# Altium PCB МПСУ.464342.21-005T5M.PcbDoc
Units mm, origin at the board's own origin, x right, y up, seen from the top; angles counter-clockwise.
Board outline 125.5 x 85.5 mm, 2 copper layers (Top Layer, Bottom Layer), stack 0.543 mm thick; 73 components, 36 nets, 281 pads, 1689 vias.
Unrouted connection lines stored in the file: 83.
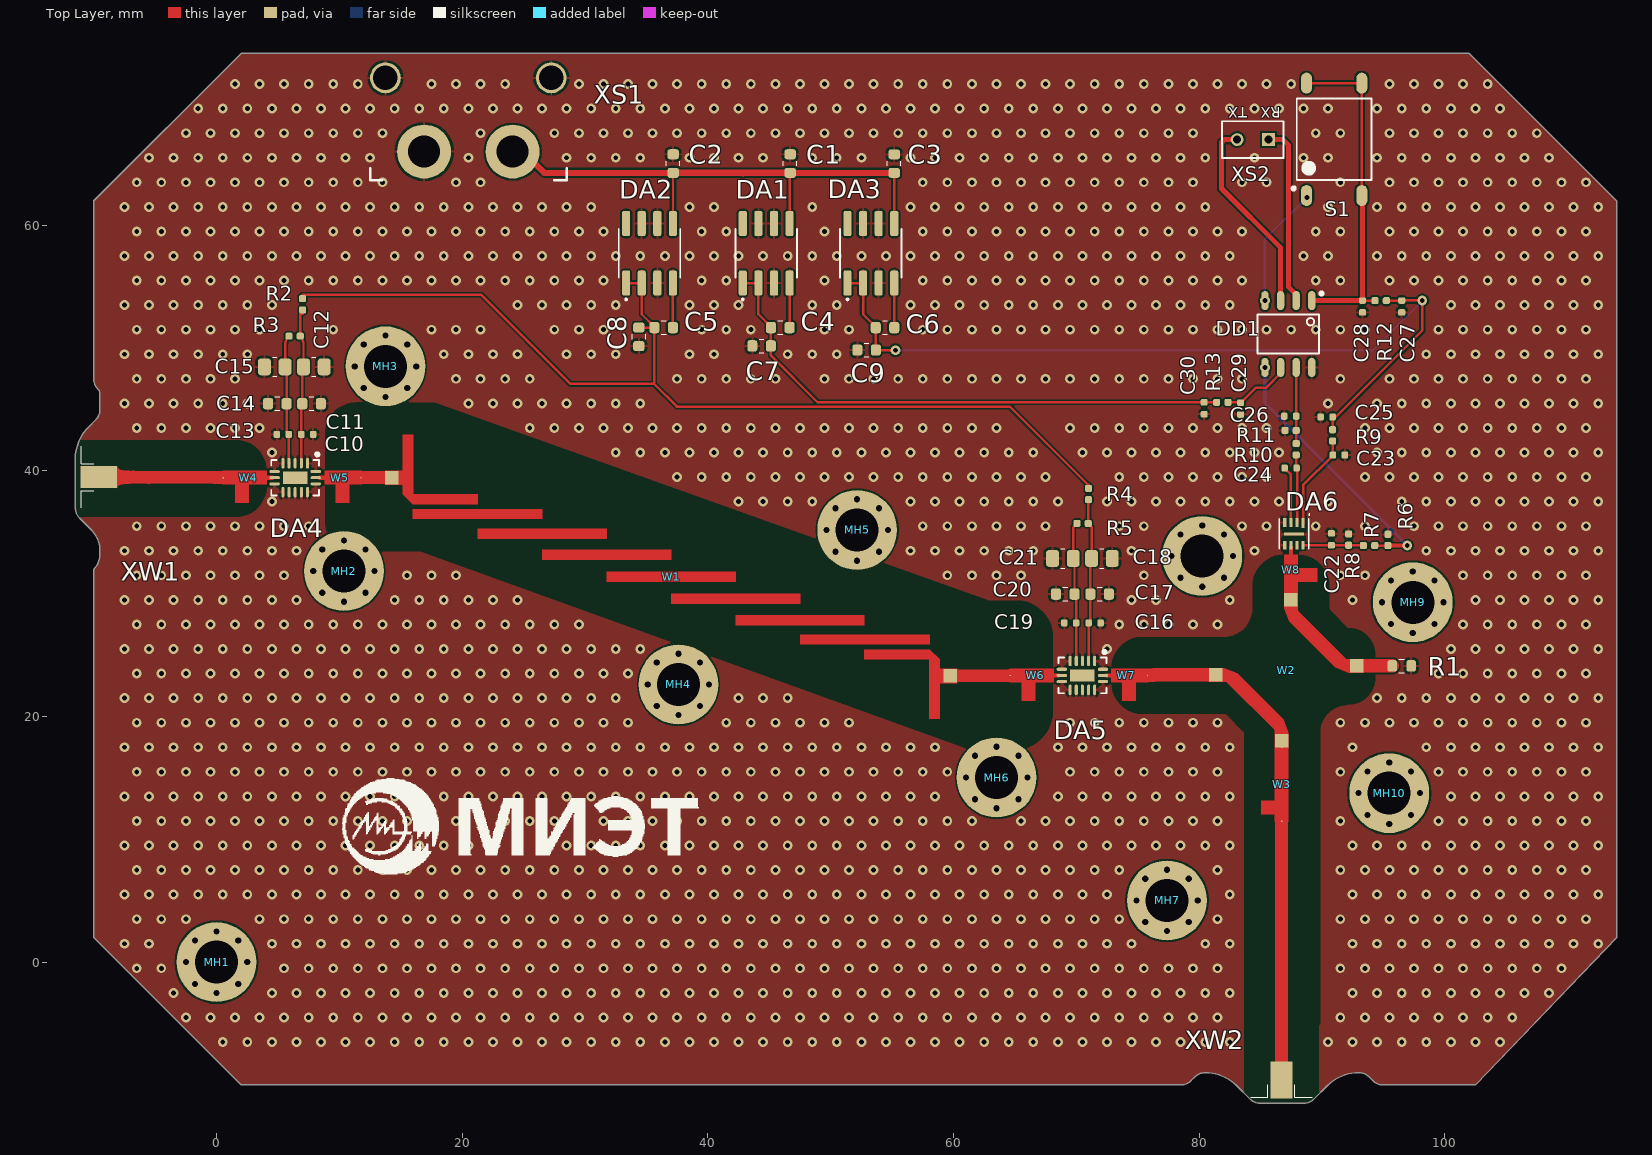
[diagram p0: Top Layer view]
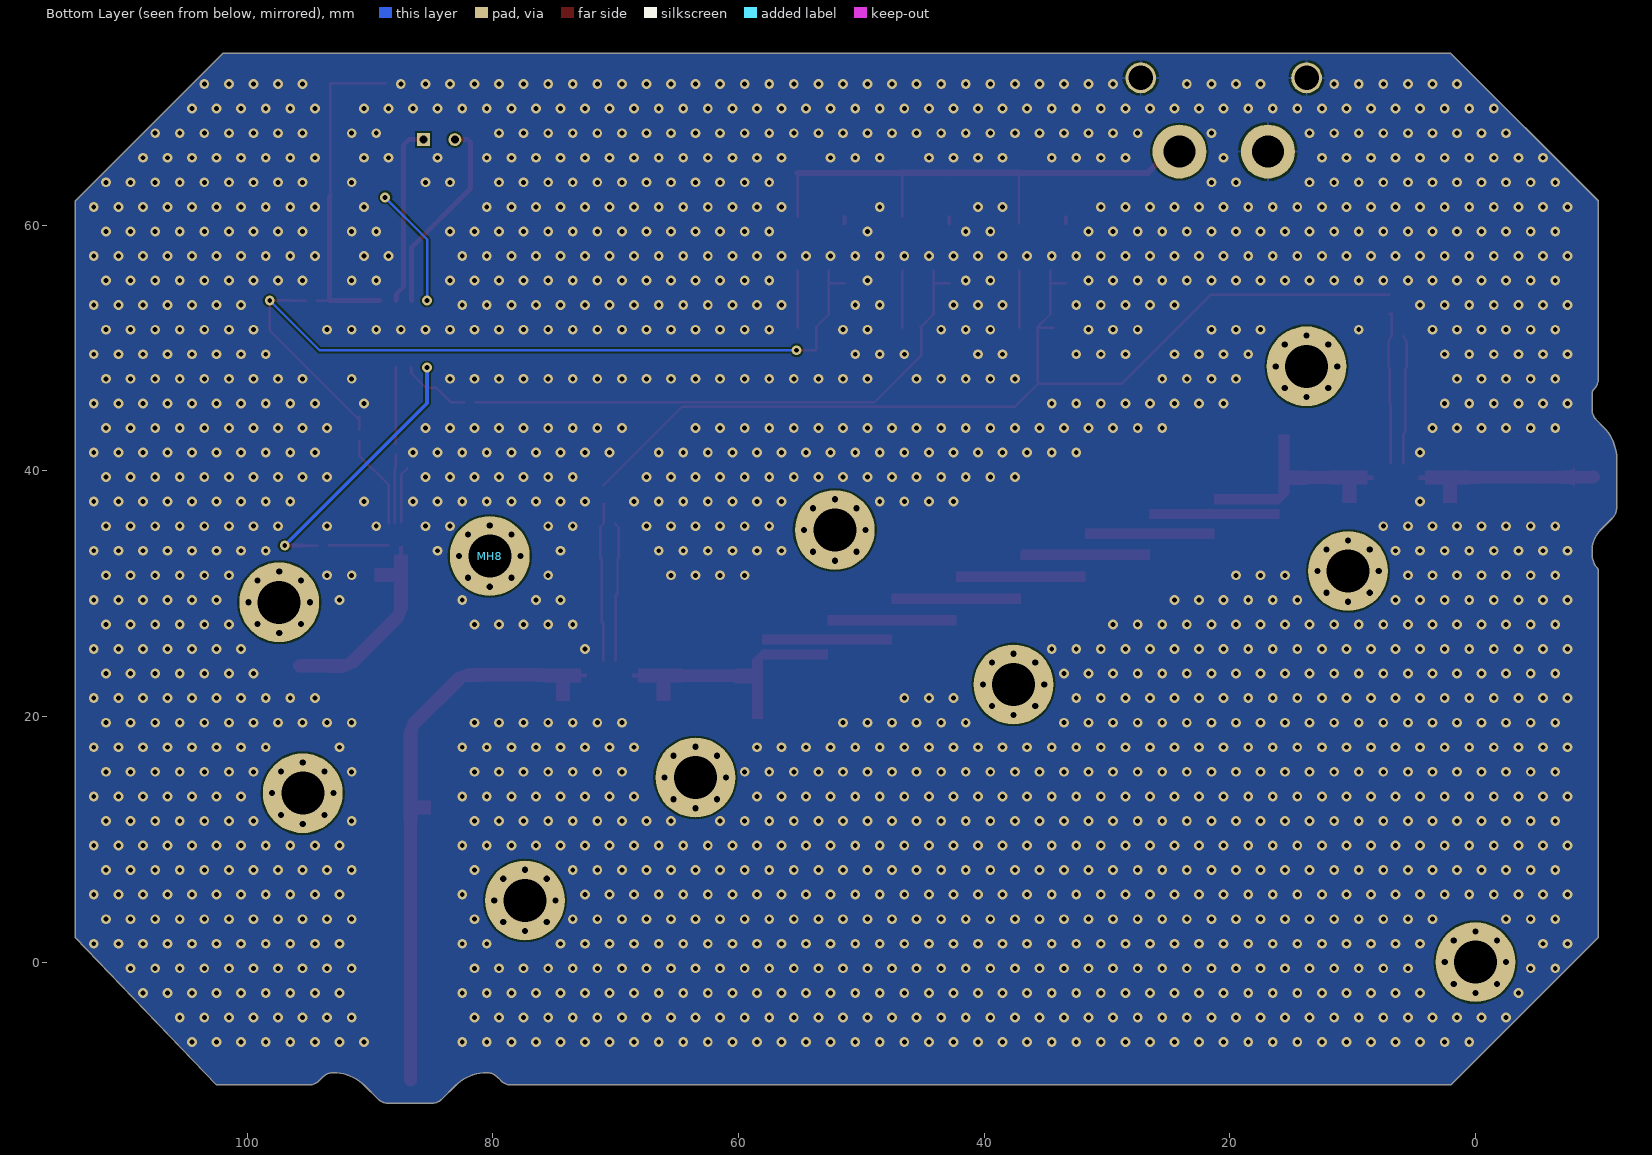
[diagram p1: Bottom Layer view, seen from below]
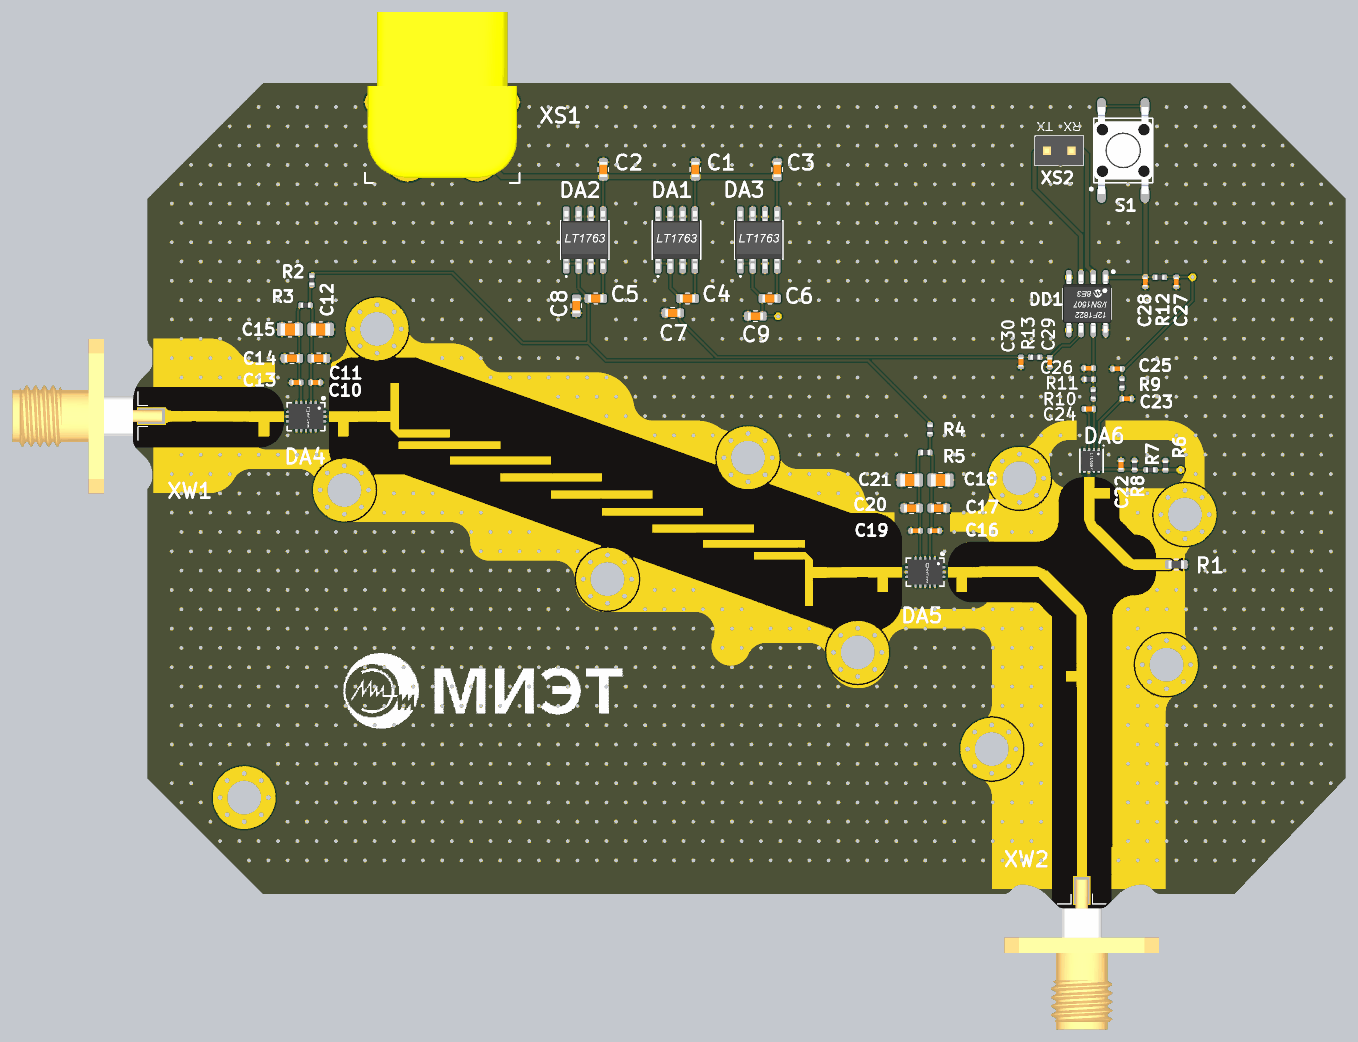
[diagram p2: 3D render of the assembled board from above, using the file's embedded part models]

## Layer stack, top to bottom
Top Solder: solder mask 0.0102, Solder Resist, Dk 3.5
Top Layer: signal copper 0.0175
RO4350B: core 0.508, RO4350B, Dk 3.48
Bottom Layer: signal copper 0.0175
Bottom Solder: solder mask 0.0102, Solder Resist, Dk 3.5

## Board outline
-10,32 ccw(c-11.207,33.207) -9.5,33.207 -9.5,33.5 ccw(c-11.914,33.5) -10.207,35.207 -11.146,36.146 cw(c-10.293,37) -11.5,37 -11.5,41 cw(c-7.879,41) -10.439,43.561 -9.854,44.146 ccw(c-10.707,45) -9.5,45 -9.5,46.293 ccw(c-10,46.293) -9.646,46.646 cw(c-8.793,47.5) -10,47.5 -10,62 2,74 102,74 114,62 114,2 102.5,-10 95,-10 cw(c95,-8.793) 94.146,-9.646 93.854,-9.354 ccw(c93,-10.207) 93,-9 ccw(c93,-12.621) 90.439,-10.061 89.354,-11.146 cw(c88.5,-10.293) 88.5,-11.5 85,-11.5 cw(c85,-10.293) 84.146,-11.146 83.061,-10.061 ccw(c80.5,-12.621) 80.5,-9 ccw(c80.5,-10.207) 79.646,-9.354 79.354,-9.646 cw(c78.5,-8.793) 78.5,-10 2,-10 -10,2

## Design rules (kind name [scope] priority, off if disabled: settings)
AcuteAngle [All] p1: minimum=6.00000000000000E+0001 checktracksonly=FALSE
BoardOutlineClearance [OnCopper] p1: gap=0.25 ignorepadtopadclearanceinfootprint=FALSE except(0: Poly-OutlineEdge)
Clearance Clearance_RFGND [InComponentClass('RF') vs InNet('GND')] p1 off: gap=5 ignorepadtopadclearanceinfootprint=FALSE
Clearance [All] p2: gap=0.15 ignorepadtopadclearanceinfootprint=FALSE
ComponentClearance ComponentClearance_Matching [InComponentClass('RF')] p1: gap=-3 collisioncheckmode=3 verticalgap=2540 showdistances=FALSE
ComponentClearance [All] p2: gap=-5 collisioncheckmode=3 verticalgap=2540 showdistances=TRUE
HoleSize [All] p1: absolutevalues=TRUE maxlimit=3.5 minlimit=0.4 maxpercent=80.000 minpercent=20.000
HoleToHoleClearance [All] p1: gap=0.2 allowstackedmicrovias=FALSE
MinimumAnnularRing MinimumAnnularRingVIA [IsVia] p1: minimumring=0.15
MinimumAnnularRing MinimumAnnularRingPAD [IsPad] p2: minimumring=0.2
MinimumSolderMaskSliver [All] p1: minsoldermaskwidth=0.15
PermittedLayers [All] p1: toplayerpermitted=TRUE bottomlayerpermitted=TRUE
PolygonConnect PolygonConnectMH [HasFootprint('MH_M3')] p1: connectstyle=Relief reliefconductorwidth=0.3 reliefentries=4 polygonreliefangle="90 Angle" airgapwidth=0.5
PolygonConnect PolygonConnectFilterGND [IsPad and InComponent('W1') and InNet('GND')] p2: connectstyle=Direct reliefconductorwidth=0.254 reliefentries=4 polygonreliefangle="90 Angle" airgapwidth=0.254
PolygonConnect PolygonConnectRFCons [InComponentClass('RFCons') and InNet('GND')] p3: connectstyle=Direct reliefconductorwidth=0.254 reliefentries=4 polygonreliefangle="90 Angle" airgapwidth=0.254
PolygonConnect PolygonConnectGNDVia [IsVia and InNet('GND')] p4: connectstyle=Direct reliefconductorwidth=0.254 reliefentries=4 polygonreliefangle="90 Angle" airgapwidth=0.254
PolygonConnect PolygonConnectRF [InNet('GND') and InComponentClass('RF')] p5: connectstyle=Relief reliefconductorwidth=0.2 reliefentries=4 polygonreliefangle="90 Angle" airgapwidth=0.2
PolygonConnect [All] p6: connectstyle=Relief reliefconductorwidth=0.2 reliefentries=4 polygonreliefangle="90 Angle" airgapwidth=0.2
RoutingCorners RoutingCorners_RF [InNetClass('RF')] p1: cornerstyle=Round minsetback=1.1 maxsetback=5
RoutingCorners [All] p2: cornerstyle=45-Degree minsetback=2.54 maxsetback=2.54
RoutingLayers RoutingLayersRF [InNetClass('RF')] p1: top layer_v5=TRUE bottom layer_v5=FALSE
RoutingLayers [All] p2: top layer_v5=TRUE bottom layer_v5=TRUE
RoutingVias [All] p1: holewidth=0.4 width=0.8 viastyle="Through Hole" minholewidth=0.4 minwidth=0.8 maxholewidth=0.4 maxwidth=0.8
SilkToSilkClearance [All] p1: silktosilkclearance=0.15
SilkToSolderMaskClearance [IsPad] p1: minsilkscreentomaskgap=0.15 clearancetoexposedcopper=TRUE
SolderMaskExpansion SolderMaskExpansionGNDVia [IsVia and InNet('GND')] p1: expansion=0.102 istentingtop=TRUE
SolderMaskExpansion [All] p2: expansion=0.05 istentingtop=FALSE
UnConnectedPin [All] p1:
Width WidthRF [InNetClass('RF')] p1: maxlimit=1.15 minlimit=1.05 preferedwidth=1.1
Width [All] p2: maxlimit=0.5 minlimit=0.2 preferedwidth=0.3
22 further rules are at their usual default settings.

## Classes and differential pairs
component class RFCons: XW1 XW2
component class RFDevices: DA4 DA5 DA6
component class RF: W1 W3 W4 W5 W6 W7 W8
channel class "МПСУ.464342.21-005 Э3 Лист2": LNA1 LNA2
net class RF: LNA_RF_IN_LNA1 LNA_RF_IN_LNA2 LNA_RF_OUT_LNA1 LNA_RF_OUT_LNA2 LTC_RF_IN NetDA4_7 NetDA4_15 NetDA5_7 NetDA5_15 NetDA6_6 NetR1_2 NetW2_2 NetW3_2
component class "МПСУ.464342.21-005 Э3 Лист8": R1 W1 W2 W3 XS1 XW1 XW2
component class PowerManagment: C1 C2 C3 C4 C5 C6 C7 C8 C9 DA1 DA2 DA3
component class PowerDetector: C22 C23 C24 C25 C26 DA6 R6 R7 R8 R9 R10 R11 W8
component class Microcontroller: C27 C28 C29 C30 DD1 R12 R13 S1 XS2
component class LNA2: C16 C17 C18 C19 C20 C21 DA5 R4 R5 W6 W7
component class LNA1: C10 C11 C12 C13 C14 C15 DA4 R2 R3 W4 W5

## Components (designator, comment, footprint, x,y, rotation, side; value= is the part's Value field where it differs from the comment)
C1 "1 uF" CAPC160X80X90L30N 46.705,65.028 r270 top
C2 "1 uF" CAPC160X80X90L30N 37.175,65.028 r270 top
C3 "1 uF" CAPC160X80X90L30N 55.178,65.026 r270 top
C4 "10 pF" CAPC160X80X90L30N 45.9,51.673 r0 top
C5 "10 pF" CAPC160X80X90L30N 36.4,51.673 r0 top
C6 "10 pF" CAPC160X80X90L30N 54.425,51.673 r0 top
C7 "10 uF" CAPC160X80X90L30N 44.375,50.175 r0 top
C8 "10 uF" CAPC160X80X90L30N 34.38,50.92 r90 top
C9 "10 uF" CAPC160X80X90L30N 52.925,49.848 r0 top
C10 "100 pF" CAPC100X50X55L20N 7.385,42.973 r180 top
C11 "1 uF" CAPC160X80X90L30N 7.73,45.473 r180 top
C12 "0.33 uF" CAPC200X125X95L50N 7.915,48.473 r180 top
C13 "100 pF" CAPC100X50X55L20N 5.39,42.973 r180 top
C14 "1 uF" CAPC160X80X90L30N 4.945,45.473 r180 top
C15 "0.33 uF" CAPC200X125X95L50N 4.735,48.473 r180 top
C16 "100 pF" CAPC100X50X55L20N 71.494,27.623 r180 top (schematic designator C10)
C17 "1 uF" CAPC160X80X90L30N 71.9,29.973 r180 top (schematic designator C11)
C18 "0.33 uF" CAPC200X125X95L50N 72.09,32.873 r180 top (schematic designator C12)
C19 "100 pF" CAPC100X50X55L20N 69.506,27.623 r180 top (schematic designator C13)
C20 "1 uF" CAPC160X80X90L30N 69.1,29.973 r180 top (schematic designator C14)
C21 "0.33 uF" CAPC200X125X95L50N 68.91,32.873 r180 top (schematic designator C15)
C22 "10 pF" CAPC100X50X55L20N 90.775,34.433 r270 top (schematic designator C16)
C23 "OPT" CAPC100X50X55L20N 91.38,41.293 r180 top (schematic designator C17)
C24 "10 nF" CAPC100X50X55L20N 87.45,40.231 r0 top (schematic designator C18)
C25 "100 nF" CAPC100X50X55L20N 90.385,44.393 r0 top (schematic designator C19)
C26 "1 uF" CAPC100X50X55L20N 87.42,44.456 r0 top (schematic designator C20)
C27 "100 nF" CAPC100X50X55L20N 96.5,53.388 r90 top (schematic designator C21)
C28 "OPT" CAPC100X50X55L20N 93.3,53.388 r90 top (schematic designator C22)
C29 "OPT" CAPC100X50X55L20N 83.388,45.076 r90 top (schematic designator C23)
C30 "100 nF" CAPC100X50X55L20N 80.413,45.101 r90 top (schematic designator C24)
DA1 "LT1763-1.5" SOIC8P127_490X600X175L83X41N 44.75,57.723 r0 top
DA2 "LT1763-2.5" SOIC8P127_490X600X175L83X41N 35.25,57.723 r0 top
DA3 "LT1763-3.3" SOIC8P127_490X600X175L83X41N 53.275,57.723 r0 top
DA4 "PMA-183PLN+" JV2579 6.4,39.448 r180 top
DA5 "PMA-183PLN+" JV2579 70.5,23.348 r180 top (schematic designator DA4)
DA6 "LTC5597" LTC5597 87.725,34.873 r180 top (schematic designator DA5)
DD1 "PIC12F1822-I/SN" SN-SOIC127P600X175-8N 87.27,51.148 r270 top
MH1 "Comment" MH_M3#1 0,0 r0 top
MH2 "Comment" MH_M3#2 10.368,31.843 r0 top
MH3 "Comment" MH_M3#3 13.753,48.517 r0 top
MH4 "Comment" MH_M3#4 37.608,22.618 r0 top
MH5 "Comment" MH_M3#5 52.16,35.191 r0 top
MH6 "Comment" MH_M3#6 63.515,15.036 r0 top
MH7 "Comment" MH_M3#7 77.39,5.024 r0 top
MH8 "Comment" MH_M3#8 80.257,33.065 r180 bottom
MH9 "Comment" MH_M3#9 97.4,29.305 r0 top
MH10 "Comment" MH_M3#10 95.482,13.76 r0 top
R1 "50 Ohm" RESC160X80X60L30N 96.5,24.125 r180 top value=10
R2 "10 Ohm" RESC100X50X40L25N 7,53.568 r270 top
R3 "180 Ohm" RESC100X50X40L25N 6.35,50.973 r180 top
R4 "10 Ohm" RESC100X50X40L25N 71,38.118 r270 top (schematic designator R2)
R5 "180 Ohm" RESC100X50X40L25N 70.515,35.723 r180 top (schematic designator R3)
R6 "OPT" RESC100X50X40L25N 95.375,34.383 r270 top (schematic designator R4)
R7 "2 kOhm" RESC100X50X40L25N 93.84,33.923 r180 top (schematic designator R5)
R8 "3 kOhm" RESC100X50X40L25N 92.175,34.408 r270 top (schematic designator R6)
R9 "1 Ohm" RESC100X50X40L25N 90.87,42.893 r90 top (schematic designator R7)
R10 "100 Ohm" RESC100X50X40L25N 87.91,41.766 r90 top (schematic designator R8)
R11 "OPT" RESC100X50X40L25N 87.45,43.306 r0 top (schematic designator R9)
R12 "1 Ohm" RESC100X50X40L25N 94.785,53.863 r0 top (schematic designator R10)
R13 "1 Ohm" RESC100X50X40L25N 81.893,45.586 r180 top (schematic designator R11)
S1 "L-KLS7-TS6604-4.3-180-B" DIP2_SOIC450P1000X350-4N 91,67 r90 top
W1 "Filter" MFilter8_5G 13.725,39.45 r0 top net-tie
W2 "Colinear Coupler" CLCoupler 81.35,23.4 r0 top net-tie
W3 "Matching" MATCHING_MAIN_OUT 86.725,17.525 r270 top net-tie
W4 "Matching" MATCHING_LNA_IN 4.6,39.448 r0 top net-tie
W5 "Matching" MATCHING_LNA_OUT 8.3,39.448 r0 top net-tie
W6 "Matching" MATCHING_LNA_IN 68.675,23.348 r0 top net-tie (schematic designator W4)
W7 "Matching" MATCHING_LNA_OUT 72.35,23.348 r0 top net-tie (schematic designator W5)
W8 "Matching" MATCHING_LTC_IN 87.475,33.873 r90 top net-tie (schematic designator W6)
XS1 "XT-60-PW-F" XT-60-PW-F 20.5,66 r0 top
XS2 "PBD-2 2x1" RHDRV2W45P254_1X2_304X500H500 85.64,66.975 r270 top
XW1 "SMA862A1-0000" SMA862A1-0000 -11.5,39.5 r180 top
XW2 "SMA862A1-0000" SMA862A1-0000 86.7,-11.5 r270 top

## Footprints (in the part's own frame and the unit in brackets; to place one, negate y for a bottom-side part, rotate by r counter-clockwise, add the part's x,y. Pads: shape width x height; smd on the part's side, far side on the other; paste and mask are expansions set on the pad)
CAPC100X50X55L20N [mm] "Capacitor, Chip; 1.00 mm L X 0.50 mm W X 0.55 mm H body"
  rrect49% 0.53x0.58 smd: 1(-0.485,0) 2(0.485,0)
  body extent -0.5,-0.25 0.5,0.25, height 0.55
CAPC160X80X90L30N [mm] "Capacitor, Chip; 1.60 mm L X 0.80 mm W X 0.90 mm H body"
  rrect51% 0.82x0.93 smd: 1(-0.755,0) 2(0.755,0)
  silkscreen extent -0.2,-0.55 0.2,0.55, body extent -0.8,-0.4 0.8,0.4, height 0.9
CAPC200X125X95L50N [mm] "Capacitor, Chip; 2.00 mm L X 1.25 mm W X 0.95 mm H body"
  rrect48% 1.05x1.38 smd: 1(-0.84,0) 2(0.84,0)
  silkscreen extent -0.17,-0.78 0.17,0.78, body extent -1,-0.63 1,0.63, height 0.95
CLCoupler [mm] "Coupler 40 dB, diel RO4003 0.5 oz ED 20 mil"
  rect 1.1x1.1 smd paste-0.55 mask-0.55: 1(0,0) 2(5.375,-5.375) 3(11.5,0.725) 4(6.125,6.1)
  Top Layer region: -0.55,0.55 -0.55,-0.55 0.875,-0.549 0.987,-0.67 4.713,-4.397 4.825,-4.5 4.825,-5.925 5.925,-5.925 5.925,-4.675 5.491,-3.619 1.765,0.108 0.7,0.55
  Top Layer region: 5.575,6.65 5.575,5.42 6.007,4.35 9.725,0.625 10.8,0.175 12.05,0.175 12.05,1.275 10.65,1.275 10.525,1.4 6.785,5.128 6.675,5.25 6.675,6.65
DIP2_SOIC450P1000X350-4N [mm] "SOIP=C, 4-Leads, Body 6,00x6,00mm, Pitch 4,50mm, IPC Medium Density"
  oval 1.7x0.9 smd: 1(-4.575,2.25) 2(-4.575,-2.25) 3(4.575,-2.25) 4(4.575,2.25)
  silkscreen extent -4.12,-3.05 3.32,3.42, body extent -4.5,-3 4.5,3, height 7.17
JV2579 [mm] "QFN, 17-Leads, Body   2.5x3.5mm, Pitch 0.51mm, Thermal Pad 2x1mm, IPC Medium Density"
  oval 0.25x0.85 smd: 1(-1,-1.175) 2(-0.5,-1.175) 3(0,-1.175) 4(0.5,-1.175) 5(1,-1.175) 9(1,1.175) 10(0.5,1.175) 11(0,1.175) 12(-0.5,1.175) 13(-1,1.175)
  oval 0.85x0.25 smd: 6(1.675,-0.5) 7(1.675,0) 8(1.675,0.5) 14(-1.675,0.5) 15(-1.675,0) 16(-1.675,-0.5)
  rect 2x1 smd: 17(0,0)
  silkscreen extent -1.95,-2.02 1.95,1.45, body extent -1.8,-1.3 1.8,1.3, height 0.85
LTC5597 [mm] "DFN 8-Leads, Body 2,00x2,00mm, Pitch 0,50mm, Thermal Pad 1,60x0,25mm, IPC Medium Density"
  rect 0.25x0.8 smd: 1(-0.75,-0.875)
  rect 0.25x0.7 smd: 2(-0.25,-0.925) 3(0.25,-0.925) 4(0.75,-0.925) 5(0.75,0.925) 6(0.25,0.925) 7(-0.25,0.925) 8(-0.75,0.925)
  rect 1.6x0.25 smd: 9(0,0)
  silkscreen extent -1.3,-1.62 1.2,1.2, body extent -1.05,-1.1 1.05,1.1, height 0.8
MATCHING_LNA_IN [mm]
  rect 0.1x0.1 smd paste-0.05 mask-0.05: 1(-4.05,0) 2(0,0)
  Top Layer region: -3.1,-2.05 -3.1,-0.55 -4.1,-0.55 -4.1,0.55 -0.5,0.55 -0.5,0.15 0,0.15 0,-0.15 -0.5,-0.15 -0.5,-0.55 -2,-0.55 -2,-2.05
MATCHING_LNA_OUT [mm]
  rect 0.1x0.1 smd paste-0.05 mask-0.05: 1(0,0) 2(3.45,0)
  Top Layer region: 0.5,-0.55 0.5,-0.15 0,-0.15 0,0.15 0.5,0.15 0.5,0.55 3.5,0.55 3.5,-0.55 2.5,-0.55 2.5,-2.05 1.4,-2.05 1.4,-0.55
MATCHING_LTC_IN [mm]
  rect 0.1x0.1 smd paste-0.05 mask-0.05: 1(-3.85,0) 2(0,0)
  Top Layer region: -2.9,-2.15 -2.9,-0.55 -3.9,-0.55 -3.9,0.55 -0.7,0.55 -0.7,0.15 0,0.15 0,-0.15 -0.7,-0.15 -0.7,-0.55 -1.8,-0.55 -1.8,-2.15
MATCHING_MAIN_OUT [mm]
  rect 0.1x0.1 smd paste-0.05 mask-0.05: 1(0.05,0) 2(6.05,0)
  Top Layer region: 0,-0.55 0,0.55 6.1,0.55 6.1,-0.55 5.5,-0.55 5.5,-1.65 4.4,-1.65 4.4,-0.55
MFilter8_5G [mm] "Bandpass filter, Fc 8.50GHz, BW  500 MHz, type - Coupled Microstrip Filter, diel RO4003 0.5 oz ED 20 mil"
  rect 1.1x1.1 smd paste-0.55 mask-0.55: 1(0.55,0) 2(46.025,-16.146)
  Top Layer region: 0,-0.577 0,0.577 1.432,0.577 1.432,3.476 2.279,3.476 2.279,-1.352 7.555,-1.352 7.555,-2.146 2.253,-2.146 1.432,-1.352 1.432,-0.577
  Top Layer region: 2.253,-3.36 2.253,-2.566 12.8,-2.566 12.8,-3.36
  Top Layer region: 7.555,-4.962 18.045,-4.964 18.045,-4.14 7.555,-4.142
  Top Layer region: 12.8,-6.7 12.8,-5.877 18.045,-5.877 18.045,-5.876 23.293,-5.876 23.293,-6.7 18.045,-6.7 18.045,-6.7
  Top Layer region: 18.045,-8.485 18.045,-7.661 23.293,-7.661 28.541,-7.661 28.541,-8.485 23.293,-8.485
  Top Layer region: 23.293,-10.27 28.541,-10.27 28.541,-10.269 33.786,-10.269 33.786,-9.446 28.541,-9.446 28.541,-9.446 23.293,-9.446
  Top Layer region: 28.541,-12.006 33.786,-12.006 33.786,-12.004 39.031,-12.004 39.031,-11.184 33.786,-11.184 33.786,-11.182 28.541,-11.182
  Top Layer region: 33.786,-13.581 33.786,-12.786 44.333,-12.786 44.333,-13.581
  Top Layer region: 44.307,-15.568 44.307,-14.794 39.031,-14.794 39.031,-14 44.333,-14 45.154,-14.794 45.154,-15.569 46.586,-15.569 46.586,-16.723 45.154,-16.723 45.154,-19.622 44.307,-19.622
MH_M3#1 [mm] "Mounting Hole M3 with 8 vias"
  round 0.8 hole 0.5: 1(-2.5,0) 1(-1.768,-1.768) 1(-1.768,1.768) 1(0,-2.5) 1(0,2.5) 1(1.768,-1.768) 1(1.768,1.768) 1(2.5,0)
  round 6.5 hole 3.5 paste-6.5: MH1(0,0)
MH_M3#2 [mm] "Mounting Hole M3 with 8 vias"
  round 0.8 hole 0.5: 1(-2.5,0) 1(-1.768,-1.768) 1(-1.768,1.768) 1(0,-2.5) 1(0,2.5) 1(1.768,-1.768) 1(1.768,1.768) 1(2.5,0)
  round 6.5 hole 3.5 paste-6.5: MH2(0,0)
MH_M3#3 [mm] "Mounting Hole M3 with 8 vias"
  round 0.8 hole 0.5: 1(-2.5,0) 1(-1.768,-1.768) 1(-1.768,1.768) 1(0,-2.5) 1(0,2.5) 1(1.768,-1.768) 1(1.768,1.768) 1(2.5,0)
  round 6.5 hole 3.5 paste-6.5: MH3(0,0)
MH_M3#4 [mm] "Mounting Hole M3 with 8 vias"
  round 0.8 hole 0.5: 1(-2.5,0) 1(-1.768,-1.768) 1(-1.768,1.768) 1(0,-2.5) 1(0,2.5) 1(1.768,-1.768) 1(1.768,1.768) 1(2.5,0)
  round 6.5 hole 3.5 paste-6.5: MH4(0,0)
MH_M3#5 [mm] "Mounting Hole M3 with 8 vias"
  round 0.8 hole 0.5: 1(-2.5,0) 1(-1.768,-1.768) 1(-1.768,1.768) 1(0,-2.5) 1(0,2.5) 1(1.768,-1.768) 1(1.768,1.768) 1(2.5,0)
  round 6.5 hole 3.5 paste-6.5: MH5(0,0)
MH_M3#6 [mm] "Mounting Hole M3 with 8 vias"
  round 0.8 hole 0.5: 1(-2.5,0) 1(-1.768,-1.768) 1(-1.768,1.768) 1(0,-2.5) 1(0,2.5) 1(1.768,-1.768) 1(1.768,1.768) 1(2.5,0)
  round 6.5 hole 3.5 paste-6.5: MH6(0,0)
MH_M3#7 [mm] "Mounting Hole M3 with 8 vias"
  round 0.8 hole 0.5: 1(-2.5,0) 1(-1.768,-1.768) 1(-1.768,1.768) 1(0,-2.5) 1(0,2.5) 1(1.768,-1.768) 1(1.768,1.768) 1(2.5,0)
  round 6.5 hole 3.5 paste-6.5: MH7(0,0)
MH_M3#8 [mm] "Mounting Hole M3 with 8 vias"
  round 0.8 hole 0.5: 1(-2.5,0) 1(-1.768,-1.768) 1(-1.768,1.768) 1(0,-2.5) 1(0,2.5) 1(1.768,-1.768) 1(1.768,1.768) 1(2.5,0)
  round 6.5 hole 3.5 paste-6.5: MH8(0,0)
MH_M3#9 [mm] "Mounting Hole M3 with 8 vias"
  round 0.8 hole 0.5: 1(-2.5,0) 1(-1.768,-1.768) 1(-1.768,1.768) 1(0,-2.5) 1(0,2.5) 1(1.768,-1.768) 1(1.768,1.768) 1(2.5,0)
  round 6.5 hole 3.5 paste-6.5: MH9(0,0)
MH_M3#10 [mm] "Mounting Hole M3 with 8 vias"
  round 0.8 hole 0.5: 1(-2.5,0) 1(-1.768,-1.768) 1(-1.768,1.768) 1(0,-2.5) 1(0,2.5) 1(1.768,-1.768) 1(1.768,1.768) 1(2.5,0)
  round 6.5 hole 3.5 paste-6.5: MH10(0,0)
RESC100X50X40L25N [mm] "Resistor, Chip; 1.00 mm L X 0.50 mm W X 0.40 mm H body"
  rrect52% 0.58x0.58 smd: 1(-0.46,0) 2(0.46,0)
  body extent -0.5,-0.25 0.5,0.25, height 0.4
RESC160X80X60L30N [mm] "Resistor, Chip; 1.60 mm L X 0.80 mm W X 0.60 mm H body"
  rrect51% 0.79x0.93 smd: 1(-0.77,0) 2(0.77,0)
  silkscreen extent -0.23,-0.56 0.23,0.56, body extent -0.8,-0.4 0.8,0.4, height 0.6
RHDRV2W45P254_1X2_304X500H500 [mm] "Header, Vertical Receptacle, 2.54 mm pitch; 0.45 mm lead width, 2 pins, 2 rows, 1 pin per row, 3.04 mm L X 5.00 mm W X 5.00 mm H body"
  rect 1.05x1.05 / inner round 1.05 / far side rect 1.05x1.05 hole 0.65 paste-1.05: 1(0,0)
  round 1.05 hole 0.65 paste-1.05: 2(0,-2.54)
  silkscreen extent -1.5,-3.77 1.5,1.23, body extent -1.52,-3.77 1.52,1.23, height 5
SMA862A1-0000 [mm] "SMA Jack For Panel Receptacle 50Ohm 2 Holes"
  rect 3x1.8 smd paste-0.1 mask-0.1: 1(-1.9,0)
  silkscreen extent -1.5,-2.5 -0.5,2.5, body extent -3,-8 12.5,8, height 3.81
SN-SOIC127P600X175-8N [mm] "SOIC, 8-Leads, Body 4.90x3.90mm, Pitch 1.27mm, IPC Medium Density"
  oval 1.55x0.6 smd: 1(-2.725,1.905) 2(-2.725,0.635) 3(-2.725,-0.635) 4(-2.725,-1.905) 5(2.725,-1.905) 6(2.725,-0.635) 7(2.725,0.635) 8(2.725,1.905)
  silkscreen extent -3.42,-2.5 1.6,2.83, body extent -3,-2.5 3,2.5, height 1.75
SOIC8P127_490X600X175L83X41N [mm] "Small Outline IC (SOIC), 1.27 mm pitch; 8 pin, 4.90 mm L X 3.90 mm W X 1.75 mm H body"
  rrect52% 0.66x2.07 smd: 1(-1.905,-2.425) 2(-0.635,-2.425) 3(0.635,-2.425) 4(1.905,-2.425) 5(1.905,2.425) 6(0.635,2.425) 7(-0.635,2.425) 8(-1.905,2.425)
  silkscreen extent -2.5,-3.83 2.5,2, body extent -2.45,-3 2.45,3, height 1.75
XT-60-PW-F [mm]
  round 4.4 hole 2.6: 1(-3.6,0) 2(3.6,0)
  round 2.5 hole 2: 3(-6.75,6) 3(6.75,6)
  silkscreen extent -8,-2.35 8,-1.35, body extent -7.75,-1.85 7.75,15.35, height 8.4

## Part data
C1 C2 C3 C4 C5 C6 C7 C8 C9 C11 C14 C17 C20: library part Capacitor, "Capacitor, generic", Package=0603
C10 C13 C16 C19 C22 C23 C24 C25 C26 C27 C28 C29 C30: library part Capacitor, "Capacitor, generic", Package=0402
C12 C15 C18 C21: library part Capacitor, "Capacitor, generic", Package=0805
DA1 DA2 DA3: library part LT1763, "Micropower DC/DC Converters in SOIC8", Manufacturer="Analog Devices"
DA4 DA5: "SMT Low Noise Amplifier, 6000 - 18000 MHz, 50Ω", Manufacturer=Mini-Circuits, ComponentLink1Description=ProductPage, ComponentLink1URL=https://www.minicircuits.com/WebStore/dashboard.html?model=PMA-183PLN%2B, PartNumber=PMA-183PLN+
DA6: "100MHz to 70GHz Linear-in-dB RMS Power Detector with 35dB Dynamic Range", Manufacturer="Analog Devices", ComponentLink1Description="Product Page", ComponentLink1URL=https://www.analog.com/en/products/ltc5597.html#product-overview, PartNumber=LTC5597
DD1: library part PIC12(L)F1822, "8-bit Flash Microcontrollers with XLP Technology 3.5 KB, 128 B", PartNumber=PIC12F1822-I/SN
R1: library part Resistor, "Resistor, generic", Package=0603
R2 R3 R4 R5 R6 R7 R8 R9 R10 R11 R12 R13: library part Resistor, "Resistor, generic", Package=0402
S1: library part KLS7-TS6601-7, "Tact Switch", Manufacturer="KLS electronic co ltd", ComponentLink1Description=DataSheet, ComponentLink1URL=https://static.chipdip.ru/lib/551/DOC001551970.pdf, PartNumber=L-KLS7-TS6604-4.3-180-B
W1: library part "Filter 8.5G", "Bandpass filter, Fc 8.50GHz, BW  500 MHz, type - Coupled Microstrip Filter, diel RO4003 0.5 oz ED 20 mil"
W2: library part CLCoupler, "Coupler 40 dB, diel RO4003 0.5 oz ED 20 mil"
W3 W8: library part Matching_1
W4 W5 W6 W7: library part Matching_1, "Matching MTEE"
XS1: "Header, Right-angle, 2x1", Manufactorer="Changzhou Amass Electronics CO.LTD.", Category=Connector, ComponentLink1Description=DataSheet, ComponentLink1URL=https://www.tme.eu/ru/Document/9b8d0c5eb7094295f3d3112c214d3ade/XT60PW%20SPEC.pdf, Net1=+12V, Net2=GND, PartNumber=XT-60-PW-F
XS2: library part PBD-2, "Header, Vertical Receptacle, 2.54 mm pitch 2x1", Net1=RX, Net2=TX, PartNumber="PBD-2 2x1"
XW1 XW2: "SMA Jack For Panel Receptacle 50Ohm JYEBAO", PartNumber=SMA862A1-0000

## Via types
v1: diameter 0.8, hole 0.4, Top Layer to Bottom Layer, tented both sides, 1683 vias
v2: diameter 0.8, hole 0.4, Top Layer to Bottom Layer, 6 vias

## Nets (pads, with @x,y where several pads share a name; then routed paths per layer and width w, separated by ;. In a path a pad name is that pad's centre, name@x,y a point inside that pad or via, vN(x,y) a via of type N, cw(c..) or ccw(c..) an arc to the next point about the centre after c; other vN are vias at no path point)
+1.5V: C4.1 C7.2 C30.2 DA1.1 DA1.2 R13.2 | length 46.5
  Top Layer w0.2: DA1.1 DA1.2 ; DA1.2@44.115,56.298 DA1.2 ; R13.2 48.954,45.586 45.13,49.41 C7.2 45.138,50.183 45.138,51.666 C4.1 45.145,51.728 44.115,52.758 DA1.2
+2.5V: C5.1 C8.2 DA2.1 DA2.2 R2.1 R4.1 | length 82.6
  Top Layer w0.2: 7,54.338 21.562,54.338 28.819,47.081 35.523,47.081 35.582,47.14 ; DA2.1 DA2.2 ; C8.2 C5.1@35.64,51.674 ; DA2.2@34.615,56.298 DA2.2 ; C5.1@35.641,51.675 35.641,47.198 35.582,47.14 ; C5.1 35.645,51.728 34.615,52.758 DA2.2 ; 71,38.888 70.93,38.888 64.583,45.236 37.486,45.236 35.582,47.14
+3.3V: C6.1 C9.2 C25.2 C27.2 DA3.1 DA3.2 R9.2 R12.2 | length 71.1
  Top Layer w0.2: DA3.1 DA3.2 ; DA3.2@52.64,56.298 52.64,52.758 53.675,51.723 53.675,49.853 C9.2 53.692,49.837 55.263,49.837 v2(55.275,49.825) ; R9.2 C25.2 91,44.263 91.065,44.328 98.175,51.438 v2(98.175,53.886) 98.169,53.88 96.506,53.88 C27.2 96.495,53.868 95.25,53.868 R12.2
  Bottom Layer w0.2: v2(55.275,49.825) 94.114,49.825 v2(98.175,53.886)
ADC_IN: C26.2 DD1.7 R10.2 R11.2 | length 6.2
  Top Layer w0.2: DD1.7 C26.2 87.908,44.453 87.908,43.308 R11.2 R10.2
ADC_VREF: C29.2 DD1.6 R13.1 | length 5.8
  Top Layer w0.2: R13.1 82.365,45.573 83.375,45.573 C29.2 83.413,45.561 84.641,46.79 85.476,46.79 86.635,47.948 DD1.6
DC_IN: C1.2 C2.2 C3.2 DA1.5 DA1.8 DA2.5 DA2.8 DA3.5 DA3.8 XS1.2 | length 44.8
  Top Layer w0.2: DA2.5 37.165,60.158 37.165,60.698 37.165,64.263 C2.2 ; DA1.5@46.68,60.69 46.68,64.248 C1.2 ; DA3.5@55.178,60.678 C3.2
  Top Layer w0.3: DA2.8@33.325,60.648 33.345,60.628 DA2.8 ; DA1.8 42.845,60.668 DA1.8@42.85,60.673 ; DA3.8 51.37,60.677 DA3.8@51.375,60.682
  Top Layer w0.5: XS1.2 24.95,66 26.678,64.272 C2.2 C2.2 42.79,64.273 ; 42.845,64.218 42.79,64.273 ; C3.2 55.176,64.272 46.706,64.272 C1.2 42.79,64.273
EN: DD1.5 R6.2 R7.1 | length 22.3
  Top Layer w0.2: R7.1 R6.2
  Top Layer w0.3: v2(85.365,48.423) 85.365,48.058 DD1.5@85.375,48.048 ; R6.2 v2(96.95,33.923)
  Bottom Layer w0.3: v2(85.365,48.423) 85.365,45.508 v2(96.95,33.923)
GND: C1.1 C2.1 C3.1 C7.1 C8.1 C9.1 C10.1 C11.1 C12.1 C13.2 C14.2 C15.2 C16.1 C17.1 C18.1 C19.2 C20.2 C21.2 C22.1 C23.1 C25.1 C26.1 C27.1 C28.1 C29.1 C30.1 DA1.3 DA1.6 DA1.7 DA2.3 DA2.6 DA2.7 DA3.3 DA3.6 DA3.7 DA4.1 DA4.3 DA4.5 DA4.6 DA4.8 DA4.9 DA4.10 DA4.11 DA4.12 DA4.13 DA4.14 DA4.16 DA4.17 DA5.1 DA5.3 DA5.5 DA5.6 DA5.8 DA5.9 DA5.10 DA5.11 DA5.12 DA5.13 DA5.14 DA5.16 DA5.17 DA6.4 DA6.5 DA6.7 DA6.9 DD1.8 R1.1 R6.1 R8.1 R11.1 XS1.1 XS1.3
  other v1: 0.5,-6.5 2.5,-6.5 4.5,-6.5 6.5,-6.5 8.5,-6.5 10.5,-6.5 12.5,-6.5 14.5,-6.5 16.5,-6.5 18.5,-6.5 20.5,-6.5 22.5,-6.5 24.5,-6.5 26.5,-6.5 28.5,-6.5 30.5,-6.5 32.5,-6.5 34.5,-6.5 36.5,-6.5 38.5,-6.5 40.5,-6.5 42.5,-6.5 44.5,-6.5 46.5,-6.5 48.5,-6.5 50.5,-6.5 52.5,-6.5 54.5,-6.5 56.5,-6.5 58.5,-6.5 60.5,-6.5 62.5,-6.5 64.5,-6.5 66.5,-6.5 68.5,-6.5 70.5,-6.5 72.5,-6.5 74.5,-6.5 76.5,-6.5 78.5,-6.5 80.5,-6.5 82.5,-6.5 90.5,-6.5 92.5,-6.5 94.5,-6.5 96.5,-6.5 98.5,-6.5 100.5,-6.5 102.5,-6.5 104.5,-6.5 -2.5,-4.5 -0.5,-4.5 1.5,-4.5 3.5,-4.5 5.5,-4.5 7.5,-4.5 9.5,-4.5 11.5,-4.5 13.5,-4.5 15.5,-4.5 17.5,-4.5 19.5,-4.5 21.5,-4.5 23.5,-4.5 25.5,-4.5 27.5,-4.5 29.5,-4.5 31.5,-4.5 33.5,-4.5 35.5,-4.5 37.5,-4.5 39.5,-4.5 41.5,-4.5 43.5,-4.5 45.5,-4.5 47.5,-4.5 49.5,-4.5 51.5,-4.5 53.5,-4.5 55.5,-4.5 57.5,-4.5 59.5,-4.5 61.5,-4.5 63.5,-4.5 65.5,-4.5 67.5,-4.5 69.5,-4.5 71.5,-4.5 73.5,-4.5 75.5,-4.5 77.5,-4.5 79.5,-4.5 81.5,-4.5 91.5,-4.5 93.5,-4.5 95.5,-4.5 97.5,-4.5 99.5,-4.5 101.5,-4.5 103.5,-4.5 105.5,-4.5 -3.5,-2.5 4.5,-2.5 6.5,-2.5 8.5,-2.5 10.5,-2.5 12.5,-2.5 14.5,-2.5 16.5,-2.5 18.5,-2.5 20.5,-2.5 22.5,-2.5 24.5,-2.5 26.5,-2.5 28.5,-2.5 30.5,-2.5 32.5,-2.5 34.5,-2.5 36.5,-2.5 38.5,-2.5 40.5,-2.5 42.5,-2.5 44.5,-2.5 46.5,-2.5 48.5,-2.5 50.5,-2.5 52.5,-2.5 54.5,-2.5 56.5,-2.5 58.5,-2.5 60.5,-2.5 62.5,-2.5 64.5,-2.5 66.5,-2.5 68.5,-2.5 70.5,-2.5 72.5,-2.5 74.5,-2.5 76.5,-2.5 78.5,-2.5 80.5,-2.5 82.5,-2.5 92.5,-2.5 94.5,-2.5 96.5,-2.5 98.5,-2.5 100.5,-2.5 102.5,-2.5 104.5,-2.5 106.5,-2.5 108.5,-2.5 -6.5,-0.5 -4.5,-0.5 5.5,-0.5 7.5,-0.5 9.5,-0.5 11.5,-0.5 13.5,-0.5 15.5,-0.5 17.5,-0.5 19.5,-0.5 21.5,-0.5 23.5,-0.5 25.5,-0.5 27.5,-0.5 29.5,-0.5 31.5,-0.5 33.5,-0.5 35.5,-0.5 37.5,-0.5 39.5,-0.5 41.5,-0.5 43.5,-0.5 45.5,-0.5 47.5,-0.5 49.5,-0.5 51.5,-0.5 53.5,-0.5 55.5,-0.5 57.5,-0.5 59.5,-0.5 61.5,-0.5 63.5,-0.5 65.5,-0.5 67.5,-0.5 69.5,-0.5 71.5,-0.5 73.5,-0.5 75.5,-0.5 77.5,-0.5 79.5,-0.5 81.5,-0.5 91.5,-0.5 93.5,-0.5 95.5,-0.5 97.5,-0.5 99.5,-0.5 101.5,-0.5 103.5,-0.5 105.5,-0.5 107.5,-0.5 109.5,-0.5 -7.5,1.5 -5.5,1.5 4.5,1.5 6.5,1.5 8.5,1.5 10.5,1.5 12.5,1.5 14.5,1.5 16.5,1.5 18.5,1.5 20.5,1.5 22.5,1.5 24.5,1.5 26.5,1.5 28.5,1.5 30.5,1.5 32.5,1.5 34.5,1.5 36.5,1.5 38.5,1.5 40.5,1.5 42.5,1.5 44.5,1.5 46.5,1.5 48.5,1.5 50.5,1.5 52.5,1.5 54.5,1.5 56.5,1.5 58.5,1.5 60.5,1.5 62.5,1.5 64.5,1.5 66.5,1.5 68.5,1.5 70.5,1.5 72.5,1.5 74.5,1.5 80.5,1.5 82.5,1.5 92.5,1.5 94.5,1.5 96.5,1.5 98.5,1.5 100.5,1.5 102.5,1.5 104.5,1.5 106.5,1.5 108.5,1.5 110.5,1.5 112.5,1.5 -6.5,3.5 -4.5,3.5 -2.5,3.5 3.5,3.5 5.5,3.5 7.5,3.5 9.5,3.5 11.5,3.5 13.5,3.5 15.5,3.5 17.5,3.5 19.5,3.5 21.5,3.5 23.5,3.5 25.5,3.5 27.5,3.5 29.5,3.5 31.5,3.5 33.5,3.5 35.5,3.5 37.5,3.5 39.5,3.5 41.5,3.5 43.5,3.5 45.5,3.5 47.5,3.5 49.5,3.5 51.5,3.5 53.5,3.5 55.5,3.5 57.5,3.5 59.5,3.5 61.5,3.5 63.5,3.5 65.5,3.5 67.5,3.5 69.5,3.5 71.5,3.5 73.5,3.5 81.5,3.5 91.5,3.5 93.5,3.5 95.5,3.5 97.5,3.5 99.5,3.5 101.5,3.5 103.5,3.5 105.5,3.5 107.5,3.5 109.5,3.5 111.5,3.5 -7.5,5.5 -5.5,5.5 -3.5,5.5 -1.5,5.5 0.5,5.5 2.5,5.5 4.5,5.5 6.5,5.5 8.5,5.5 10.5,5.5 12.5,5.5 14.5,5.5 16.5,5.5 18.5,5.5 20.5,5.5 22.5,5.5 24.5,5.5 26.5,5.5 28.5,5.5 30.5,5.5 32.5,5.5 34.5,5.5 36.5,5.5 38.5,5.5 40.5,5.5 42.5,5.5 44.5,5.5 46.5,5.5 48.5,5.5 50.5,5.5 52.5,5.5 54.5,5.5 56.5,5.5 58.5,5.5 60.5,5.5 62.5,5.5 64.5,5.5 66.5,5.5 68.5,5.5 70.5,5.5 72.5,5.5 82.5,5.5 92.5,5.5 94.5,5.5 96.5,5.5 98.5,5.5 100.5,5.5 102.5,5.5 104.5,5.5 106.5,5.5 108.5,5.5 110.5,5.5 112.5,5.5 -6.5,7.5 -4.5,7.5 -2.5,7.5 -0.5,7.5 1.5,7.5 3.5,7.5 5.5,7.5 7.5,7.5 9.5,7.5 11.5,7.5 13.5,7.5 15.5,7.5 17.5,7.5 19.5,7.5 21.5,7.5 23.5,7.5 25.5,7.5 27.5,7.5 29.5,7.5 31.5,7.5 33.5,7.5 35.5,7.5 37.5,7.5 39.5,7.5 41.5,7.5 43.5,7.5 45.5,7.5 47.5,7.5 49.5,7.5 51.5,7.5 53.5,7.5 55.5,7.5 57.5,7.5 59.5,7.5 61.5,7.5 63.5,7.5 65.5,7.5 67.5,7.5 69.5,7.5 71.5,7.5 73.5,7.5 81.5,7.5 91.5,7.5 93.5,7.5 95.5,7.5 97.5,7.5 99.5,7.5 101.5,7.5 103.5,7.5 105.5,7.5 107.5,7.5 109.5,7.5 111.5,7.5 -7.5,9.5 -5.5,9.5 -3.5,9.5 -1.5,9.5 0.5,9.5 2.5,9.5 4.5,9.5 6.5,9.5 8.5,9.5 10.5,9.5 12.5,9.5 14.5,9.5 16.5,9.5 18.5,9.5 20.5,9.5 22.5,9.5 24.5,9.5 26.5,9.5 28.5,9.5 30.5,9.5 32.5,9.5 34.5,9.5 36.5,9.5 38.5,9.5 40.5,9.5 42.5,9.5 44.5,9.5 46.5,9.5 48.5,9.5 50.5,9.5 52.5,9.5 54.5,9.5 56.5,9.5 58.5,9.5 60.5,9.5 62.5,9.5 64.5,9.5 66.5,9.5 68.5,9.5 70.5,9.5 72.5,9.5 74.5,9.5 76.5,9.5 78.5,9.5 80.5,9.5 82.5,9.5 92.5,9.5 94.5,9.5 96.5,9.5 98.5,9.5 100.5,9.5 102.5,9.5 104.5,9.5 106.5,9.5 108.5,9.5 110.5,9.5 112.5,9.5 -6.5,11.5 -4.5,11.5 -2.5,11.5 -0.5,11.5 1.5,11.5 3.5,11.5 5.5,11.5 7.5,11.5 9.5,11.5 11.5,11.5 13.5,11.5 15.5,11.5 17.5,11.5 19.5,11.5 21.5,11.5 23.5,11.5 25.5,11.5 27.5,11.5 29.5,11.5 31.5,11.5 33.5,11.5 35.5,11.5 37.5,11.5 39.5,11.5 41.5,11.5 43.5,11.5 45.5,11.5 47.5,11.5 49.5,11.5 51.5,11.5 53.5,11.5 55.5,11.5 57.5,11.5 59.5,11.5 61.5,11.5 65.5,11.5 67.5,11.5 69.5,11.5 71.5,11.5 73.5,11.5 75.5,11.5 77.5,11.5 79.5,11.5 81.5,11.5 91.5,11.5 99.5,11.5 101.5,11.5 103.5,11.5 105.5,11.5 107.5,11.5 109.5,11.5 111.5,11.5 -7.5,13.5 -5.5,13.5 -3.5,13.5 -1.5,13.5 0.5,13.5 2.5,13.5 4.5,13.5 6.5,13.5 8.5,13.5 10.5,13.5 12.5,13.5 14.5,13.5 16.5,13.5 18.5,13.5 20.5,13.5 22.5,13.5 24.5,13.5 26.5,13.5 28.5,13.5 30.5,13.5 32.5,13.5 34.5,13.5 36.5,13.5 38.5,13.5 40.5,13.5 42.5,13.5 44.5,13.5 46.5,13.5 48.5,13.5 50.5,13.5 52.5,13.5 54.5,13.5 56.5,13.5 58.5,13.5 68.5,13.5 70.5,13.5 72.5,13.5 74.5,13.5 76.5,13.5 78.5,13.5 80.5,13.5 82.5,13.5 100.5,13.5 102.5,13.5 104.5,13.5 106.5,13.5 108.5,13.5 110.5,13.5 112.5,13.5 -6.5,15.5 -4.5,15.5 -2.5,15.5 -0.5,15.5 1.5,15.5 3.5,15.5 5.5,15.5 7.5,15.5 9.5,15.5 11.5,15.5 13.5,15.5 15.5,15.5 17.5,15.5 19.5,15.5 21.5,15.5 23.5,15.5 25.5,15.5 27.5,15.5 29.5,15.5 31.5,15.5 33.5,15.5 35.5,15.5 37.5,15.5 39.5,15.5 41.5,15.5 43.5,15.5 45.5,15.5 47.5,15.5 49.5,15.5 51.5,15.5 53.5,15.5 55.5,15.5 57.5,15.5 59.5,15.5 69.5,15.5 71.5,15.5 73.5,15.5 75.5,15.5 77.5,15.5 79.5,15.5 81.5,15.5 91.5,15.5 99.5,15.5 101.5,15.5 103.5,15.5 105.5,15.5 107.5,15.5 109.5,15.5 111.5,15.5 -7.5,17.5 -5.5,17.5 -3.5,17.5 -1.5,17.5 0.5,17.5 2.5,17.5 4.5,17.5 6.5,17.5 8.5,17.5 10.5,17.5 12.5,17.5 14.5,17.5 16.5,17.5 18.5,17.5 20.5,17.5 22.5,17.5 24.5,17.5 26.5,17.5 28.5,17.5 30.5,17.5 32.5,17.5 34.5,17.5 36.5,17.5 38.5,17.5 40.5,17.5 42.5,17.5 44.5,17.5 46.5,17.5 48.5,17.5 50.5,17.5 52.5,17.5 54.5,17.5 56.5,17.5 58.5,17.5 68.5,17.5 70.5,17.5 72.5,17.5 74.5,17.5 76.5,17.5 78.5,17.5 80.5,17.5 82.5,17.5 92.5,17.5 98.5,17.5 100.5,17.5 102.5,17.5 104.5,17.5 106.5,17.5 108.5,17.5 110.5,17.5 112.5,17.5 -6.5,19.5 -4.5,19.5 -2.5,19.5 -0.5,19.5 1.5,19.5 3.5,19.5 5.5,19.5 7.5,19.5 9.5,19.5 11.5,19.5 13.5,19.5 15.5,19.5 17.5,19.5 19.5,19.5 21.5,19.5 23.5,19.5 25.5,19.5 27.5,19.5 29.5,19.5 31.5,19.5 33.5,19.5 41.5,19.5 43.5,19.5 45.5,19.5 47.5,19.5 49.5,19.5 51.5,19.5 69.5,19.5 71.5,19.5 73.5,19.5 75.5,19.5 77.5,19.5 79.5,19.5 81.5,19.5 91.5,19.5 93.5,19.5 95.5,19.5 97.5,19.5 99.5,19.5 101.5,19.5 103.5,19.5 105.5,19.5 107.5,19.5 109.5,19.5 111.5,19.5 -7.5,21.5 -5.5,21.5 -3.5,21.5 -1.5,21.5 0.5,21.5 2.5,21.5 4.5,21.5 6.5,21.5 8.5,21.5 10.5,21.5 12.5,21.5 14.5,21.5 16.5,21.5 18.5,21.5 20.5,21.5 22.5,21.5 24.5,21.5 26.5,21.5 28.5,21.5 30.5,21.5 32.5,21.5 42.5,21.5 44.5,21.5 46.5,21.5 94.5,21.5 96.5,21.5 98.5,21.5 100.5,21.5 102.5,21.5 104.5,21.5 106.5,21.5 108.5,21.5 110.5,21.5 112.5,21.5 -6.5,23.5 -4.5,23.5 -2.5,23.5 -0.5,23.5 1.5,23.5 3.5,23.5 5.5,23.5 7.5,23.5 9.5,23.5 11.5,23.5 13.5,23.5 15.5,23.5 17.5,23.5 19.5,23.5 21.5,23.5 23.5,23.5 25.5,23.5 27.5,23.5 29.5,23.5 31.5,23.5 33.5,23.5 99.5,23.5 101.5,23.5 103.5,23.5 105.5,23.5 107.5,23.5 109.5,23.5 111.5,23.5 -7.5,25.5 -5.5,25.5 -3.5,25.5 -1.5,25.5 0.5,25.5 2.5,25.5 4.5,25.5 6.5,25.5 8.5,25.5 10.5,25.5 12.5,25.5 14.5,25.5 16.5,25.5 18.5,25.5 20.5,25.5 22.5,25.5 24.5,25.5 26.5,25.5 28.5,25.5 30.5,25.5 32.5,25.5 34.5,25.5 72.5,25.5 100.5,25.5 102.5,25.5 104.5,25.5 106.5,25.5 108.5,25.5 110.5,25.5 112.5,25.5 -6.5,27.5 -4.5,27.5 -2.5,27.5 -0.5,27.5 1.5,27.5 3.5,27.5 5.5,27.5 7.5,27.5 9.5,27.5 11.5,27.5 13.5,27.5 15.5,27.5 17.5,27.5 19.5,27.5 21.5,27.5 23.5,27.5 25.5,27.5 27.5,27.5 29.5,27.5 73.5,27.5 75.5,27.5 77.5,27.5 79.5,27.5 81.5,27.5 101.5,27.5 103.5,27.5 105.5,27.5 107.5,27.5 109.5,27.5 111.5,27.5 -7.5,29.5 -5.5,29.5 -3.5,29.5 -1.5,29.5 0.5,29.5 2.5,29.5 4.5,29.5 6.5,29.5 14.5,29.5 16.5,29.5 18.5,29.5 20.5,29.5 22.5,29.5 24.5,29.5 74.5,29.5 76.5,29.5 82.5,29.5 92.5,29.5 102.5,29.5 104.5,29.5 106.5,29.5 108.5,29.5 110.5,29.5 112.5,29.5 -6.5,31.5 -4.5,31.5 -2.5,31.5 -0.5,31.5 1.5,31.5 3.5,31.5 5.5,31.5 15.5,31.5 17.5,31.5 19.5,31.5 59.5,31.5 61.5,31.5 63.5,31.5 65.5,31.5 75.5,31.5 91.5,31.5 93.5,31.5 101.5,31.5 103.5,31.5 105.5,31.5 107.5,31.5 109.5,31.5 111.5,31.5 -7.5,33.5 -5.5,33.5 -3.5,33.5 -1.5,33.5 0.5,33.5 2.5,33.5 4.5,33.5 6.5,33.5 56.5,33.5 58.5,33.5 60.5,33.5 62.5,33.5 64.5,33.5 66.5,33.5 74.5,33.5 84.5,33.5 98.5,33.5 100.5,33.5 102.5,33.5 104.5,33.5 106.5,33.5 108.5,33.5 110.5,33.5 112.5,33.5 -6.5,35.5 -4.5,35.5 -2.5,35.5 -0.5,35.5 1.5,35.5 3.5,35.5 5.5,35.5 7.5,35.5 57.5,35.5 59.5,35.5 61.5,35.5 63.5,35.5 65.5,35.5 67.5,35.5 73.5,35.5 75.5,35.5 83.5,35.5 85.5,35.5 89.5,35.5 93.5,35.5 97.5,35.5 99.5,35.5 101.5,35.5 103.5,35.5 105.5,35.5 107.5,35.5 109.5,35.5 111.5,35.5 4.5,37.5 42.5,37.5 44.5,37.5 46.5,37.5 48.5,37.5 56.5,37.5 58.5,37.5 60.5,37.5 62.5,37.5 64.5,37.5 66.5,37.5 68.5,37.5 72.5,37.5 74.5,37.5 76.5,37.5 78.5,37.5 80.5,37.5 82.5,37.5 84.5,37.5 86.5,37.5 90.5,37.5 96.5,37.5 98.5,37.5 100.5,37.5 102.5,37.5 104.5,37.5 106.5,37.5 108.5,37.5 110.5,37.5 112.5,37.5 37.5,39.5 39.5,39.5 41.5,39.5 43.5,39.5 45.5,39.5 47.5,39.5 49.5,39.5 51.5,39.5 53.5,39.5 55.5,39.5 57.5,39.5 59.5,39.5 61.5,39.5 63.5,39.5 65.5,39.5 67.5,39.5 73.5,39.5 75.5,39.5 77.5,39.5 79.5,39.5 81.5,39.5 83.5,39.5 85.5,39.5 93.5,39.5 95.5,39.5 97.5,39.5 99.5,39.5 101.5,39.5 103.5,39.5 105.5,39.5 107.5,39.5 109.5,39.5 111.5,39.5 4.5,41.5 32.5,41.5 34.5,41.5 36.5,41.5 38.5,41.5 40.5,41.5 42.5,41.5 44.5,41.5 46.5,41.5 48.5,41.5 50.5,41.5 52.5,41.5 54.5,41.5 56.5,41.5 58.5,41.5 60.5,41.5 62.5,41.5 64.5,41.5 66.5,41.5 70.5,41.5 72.5,41.5 74.5,41.5 76.5,41.5 78.5,41.5 80.5,41.5 82.5,41.5 84.5,41.5 86.5,41.5 94.5,41.5 96.5,41.5 98.5,41.5 100.5,41.5 102.5,41.5 104.5,41.5 106.5,41.5 108.5,41.5 110.5,41.5 112.5,41.5 -6.5,43.5 -4.5,43.5 -2.5,43.5 -0.5,43.5 1.5,43.5 3.5,43.5 25.5,43.5 27.5,43.5 29.5,43.5 31.5,43.5 33.5,43.5 35.5,43.5 37.5,43.5 39.5,43.5 41.5,43.5 43.5,43.5 45.5,43.5 47.5,43.5 49.5,43.5 51.5,43.5 53.5,43.5 55.5,43.5 57.5,43.5 59.5,43.5 61.5,43.5 63.5,43.5 69.5,43.5 71.5,43.5 73.5,43.5 75.5,43.5 77.5,43.5 79.5,43.5 81.5,43.5 83.5,43.5 85.5,43.5 93.5,43.5 95.5,43.5 97.5,43.5 99.5,43.5 101.5,43.5 103.5,43.5 105.5,43.5 107.5,43.5 109.5,43.5 111.5,43.5 -7.5,45.5 -5.5,45.5 -3.5,45.5 -1.5,45.5 0.5,45.5 2.5,45.5 20.5,45.5 22.5,45.5 24.5,45.5 26.5,45.5 28.5,45.5 30.5,45.5 32.5,45.5 34.5,45.5 90.5,45.5 94.5,45.5 96.5,45.5 98.5,45.5 100.5,45.5 102.5,45.5 104.5,45.5 106.5,45.5 108.5,45.5 110.5,45.5 112.5,45.5 -6.5,47.5 -4.5,47.5 -2.5,47.5 -0.5,47.5 1.5,47.5 19.5,47.5 21.5,47.5 23.5,47.5 25.5,47.5 37.5,47.5 39.5,47.5 41.5,47.5 43.5,47.5 45.5,47.5 49.5,47.5 51.5,47.5 53.5,47.5 55.5,47.5 57.5,47.5 59.5,47.5 61.5,47.5 63.5,47.5 65.5,47.5 67.5,47.5 69.5,47.5 71.5,47.5 73.5,47.5 75.5,47.5 77.5,47.5 79.5,47.5 81.5,47.5 83.5,47.5 91.5,47.5 95.5,47.5 97.5,47.5 99.5,47.5 101.5,47.5 103.5,47.5 105.5,47.5 107.5,47.5 109.5,47.5 111.5,47.5 -7.5,49.5 -5.5,49.5 -3.5,49.5 -1.5,49.5 0.5,49.5 2.5,49.5 18.5,49.5 20.5,49.5 22.5,49.5 24.5,49.5 28.5,49.5 30.5,49.5 32.5,49.5 38.5,49.5 40.5,49.5 46.5,49.5 48.5,49.5 50.5,49.5 98.5,49.5 100.5,49.5 102.5,49.5 104.5,49.5 106.5,49.5 108.5,49.5 110.5,49.5 112.5,49.5 -6.5,51.5 -4.5,51.5 -2.5,51.5 -0.5,51.5 1.5,51.5 3.5,51.5 9.5,51.5 17.5,51.5 19.5,51.5 21.5,51.5 27.5,51.5 29.5,51.5 31.5,51.5 39.5,51.5 41.5,51.5 43.5,51.5 49.5,51.5 51.5,51.5 57.5,51.5 59.5,51.5 61.5,51.5 63.5,51.5 65.5,51.5 67.5,51.5 69.5,51.5 71.5,51.5 73.5,51.5 75.5,51.5 77.5,51.5 79.5,51.5 81.5,51.5 83.5,51.5 85.5,51.5 87.5,51.5 89.5,51.5 91.5,51.5 93.5,51.5 99.5,51.5 101.5,51.5 103.5,51.5 105.5,51.5 107.5,51.5 109.5,51.5 111.5,51.5 -7.5,53.5 -5.5,53.5 -3.5,53.5 -1.5,53.5 0.5,53.5 2.5,53.5 4.5,53.5 24.5,53.5 26.5,53.5 28.5,53.5 30.5,53.5 32.5,53.5 38.5,53.5 40.5,53.5 42.5,53.5 48.5,53.5 50.5,53.5 56.5,53.5 58.5,53.5 60.5,53.5 62.5,53.5 64.5,53.5 66.5,53.5 68.5,53.5 70.5,53.5 72.5,53.5 74.5,53.5 76.5,53.5 78.5,53.5 80.5,53.5 82.5,53.5 100.5,53.5 102.5,53.5 104.5,53.5 106.5,53.5 108.5,53.5 110.5,53.5 112.5,53.5 -6.5,55.5 -4.5,55.5 -2.5,55.5 -0.5,55.5 1.5,55.5 3.5,55.5 5.5,55.5 7.5,55.5 9.5,55.5 11.5,55.5 13.5,55.5 15.5,55.5 17.5,55.5 19.5,55.5 21.5,55.5 23.5,55.5 25.5,55.5 27.5,55.5 29.5,55.5 31.5,55.5 39.5,55.5 41.5,55.5 49.5,55.5 57.5,55.5 59.5,55.5 61.5,55.5 63.5,55.5 65.5,55.5 67.5,55.5 69.5,55.5 71.5,55.5 73.5,55.5 75.5,55.5 77.5,55.5 79.5,55.5 81.5,55.5 83.5,55.5 89.5,55.5 91.5,55.5 95.5,55.5 97.5,55.5 99.5,55.5 101.5,55.5 103.5,55.5 105.5,55.5 107.5,55.5 109.5,55.5 111.5,55.5 -7.5,57.5 -5.5,57.5 -3.5,57.5 -1.5,57.5 0.5,57.5 2.5,57.5 4.5,57.5 6.5,57.5 8.5,57.5 10.5,57.5 12.5,57.5 14.5,57.5 16.5,57.5 18.5,57.5 20.5,57.5 22.5,57.5 24.5,57.5 26.5,57.5 28.5,57.5 30.5,57.5 32.5,57.5 34.5,57.5 36.5,57.5 38.5,57.5 40.5,57.5 42.5,57.5 44.5,57.5 46.5,57.5 48.5,57.5 50.5,57.5 52.5,57.5 54.5,57.5 56.5,57.5 58.5,57.5 60.5,57.5 62.5,57.5 64.5,57.5 66.5,57.5 68.5,57.5 70.5,57.5 72.5,57.5 74.5,57.5 76.5,57.5 78.5,57.5 80.5,57.5 82.5,57.5 88.5,57.5 90.5,57.5 94.5,57.5 96.5,57.5 98.5,57.5 100.5,57.5 102.5,57.5 104.5,57.5 106.5,57.5 108.5,57.5 110.5,57.5 112.5,57.5 -6.5,59.5 -4.5,59.5 -2.5,59.5 -0.5,59.5 1.5,59.5 3.5,59.5 5.5,59.5 7.5,59.5 9.5,59.5 11.5,59.5 13.5,59.5 15.5,59.5 17.5,59.5 19.5,59.5 21.5,59.5 23.5,59.5 25.5,59.5 27.5,59.5 29.5,59.5 31.5,59.5 39.5,59.5 41.5,59.5 49.5,59.5 57.5,59.5 59.5,59.5 61.5,59.5 63.5,59.5 65.5,59.5 67.5,59.5 69.5,59.5 71.5,59.5 73.5,59.5 75.5,59.5 77.5,59.5 79.5,59.5 81.5,59.5 83.5,59.5 89.5,59.5 91.5,59.5 95.5,59.5 97.5,59.5 99.5,59.5 101.5,59.5 103.5,59.5 105.5,59.5 107.5,59.5 109.5,59.5 111.5,59.5 -7.5,61.5 -5.5,61.5 -3.5,61.5 -1.5,61.5 0.5,61.5 2.5,61.5 4.5,61.5 6.5,61.5 8.5,61.5 10.5,61.5 12.5,61.5 14.5,61.5 16.5,61.5 18.5,61.5 20.5,61.5 22.5,61.5 24.5,61.5 26.5,61.5 28.5,61.5 30.5,61.5 38.5,61.5 40.5,61.5 48.5,61.5 56.5,61.5 58.5,61.5 60.5,61.5 62.5,61.5 64.5,61.5 66.5,61.5 68.5,61.5 70.5,61.5 72.5,61.5 74.5,61.5 76.5,61.5 78.5,61.5 80.5,61.5 90.5,61.5 94.5,61.5 96.5,61.5 98.5,61.5 100.5,61.5 102.5,61.5 104.5,61.5 106.5,61.5 108.5,61.5 110.5,61.5 112.5,61.5 -6.5,63.5 -4.5,63.5 -2.5,63.5 -0.5,63.5 1.5,63.5 3.5,63.5 5.5,63.5 7.5,63.5 9.5,63.5 11.5,63.5 13.5,63.5 19.5,63.5 21.5,63.5 57.5,63.5 59.5,63.5 61.5,63.5 63.5,63.5 65.5,63.5 67.5,63.5 69.5,63.5 71.5,63.5 73.5,63.5 75.5,63.5 77.5,63.5 79.5,63.5 83.5,63.5 85.5,63.5 91.5,63.5 95.5,63.5 97.5,63.5 99.5,63.5 101.5,63.5 103.5,63.5 105.5,63.5 107.5,63.5 109.5,63.5 111.5,63.5 -5.5,65.5 -3.5,65.5 -1.5,65.5 0.5,65.5 2.5,65.5 4.5,65.5 6.5,65.5 8.5,65.5 10.5,65.5 12.5,65.5 20.5,65.5 28.5,65.5 30.5,65.5 32.5,65.5 34.5,65.5 38.5,65.5 40.5,65.5 42.5,65.5 44.5,65.5 48.5,65.5 50.5,65.5 52.5,65.5 56.5,65.5 58.5,65.5 60.5,65.5 62.5,65.5 64.5,65.5 66.5,65.5 68.5,65.5 70.5,65.5 72.5,65.5 74.5,65.5 76.5,65.5 78.5,65.5 80.5,65.5 84.5,65.5 88.5,65.5 90.5,65.5 94.5,65.5 96.5,65.5 98.5,65.5 100.5,65.5 102.5,65.5 104.5,65.5 106.5,65.5 108.5,65.5 -2.5,67.5 -0.5,67.5 1.5,67.5 3.5,67.5 5.5,67.5 7.5,67.5 9.5,67.5 11.5,67.5 13.5,67.5 21.5,67.5 27.5,67.5 29.5,67.5 31.5,67.5 33.5,67.5 35.5,67.5 37.5,67.5 39.5,67.5 41.5,67.5 43.5,67.5 45.5,67.5 47.5,67.5 49.5,67.5 51.5,67.5 53.5,67.5 55.5,67.5 57.5,67.5 59.5,67.5 61.5,67.5 63.5,67.5 65.5,67.5 67.5,67.5 69.5,67.5 71.5,67.5 73.5,67.5 75.5,67.5 77.5,67.5 79.5,67.5 89.5,67.5 91.5,67.5 95.5,67.5 97.5,67.5 99.5,67.5 101.5,67.5 103.5,67.5 105.5,67.5 107.5,67.5 -1.5,69.5 0.5,69.5 2.5,69.5 4.5,69.5 6.5,69.5 8.5,69.5 10.5,69.5 12.5,69.5 14.5,69.5 16.5,69.5 18.5,69.5 20.5,69.5 22.5,69.5 24.5,69.5 26.5,69.5 28.5,69.5 30.5,69.5 32.5,69.5 34.5,69.5 36.5,69.5 38.5,69.5 40.5,69.5 42.5,69.5 44.5,69.5 46.5,69.5 48.5,69.5 50.5,69.5 52.5,69.5 54.5,69.5 56.5,69.5 58.5,69.5 60.5,69.5 62.5,69.5 64.5,69.5 66.5,69.5 68.5,69.5 70.5,69.5 72.5,69.5 74.5,69.5 76.5,69.5 78.5,69.5 80.5,69.5 82.5,69.5 84.5,69.5 86.5,69.5 88.5,69.5 90.5,69.5 94.5,69.5 96.5,69.5 98.5,69.5 100.5,69.5 102.5,69.5 104.5,69.5 1.5,71.5 3.5,71.5 5.5,71.5 7.5,71.5 9.5,71.5 11.5,71.5 17.5,71.5 19.5,71.5 21.5,71.5 23.5,71.5 29.5,71.5 31.5,71.5 33.5,71.5 35.5,71.5 37.5,71.5 39.5,71.5 41.5,71.5 43.5,71.5 45.5,71.5 47.5,71.5 49.5,71.5 51.5,71.5 53.5,71.5 55.5,71.5 57.5,71.5 59.5,71.5 61.5,71.5 63.5,71.5 65.5,71.5 67.5,71.5 69.5,71.5 71.5,71.5 73.5,71.5 75.5,71.5 77.5,71.5 79.5,71.5 81.5,71.5 83.5,71.5 85.5,71.5 87.5,71.5 95.5,71.5 97.5,71.5 99.5,71.5 101.5,71.5 103.5,71.5
LNA_RF_IN_LNA1: W4.1 XW1.1 | length 11.4
  Top Layer w1.05: XW1.1 -5.525,39.475 ; -6.8,39.5 -0.175,39.456 W4.1
LNA_RF_IN_LNA2: W1.2 W6.1 | length 4.9
  Top Layer w1.05: W1.2 W6.1
LNA_RF_OUT_LNA1: W1.1 W5.2 | length 2.5
  Top Layer w1.05: W5.2 W1.1 W1.1 W1.1@14.275,39.474
LNA_RF_OUT_LNA2: W2.1 W7.2 | length 5.6
  Top Layer w1.1: W7.2 76.29,23.348 76.342,23.4 W2.1@81.35,23.4
LTC_RF_IN: W2.4 W8.1
NetC4_2: C4.2 DA1.4 | length 4.6
  Top Layer w0.2: C4.2 DA1.4@46.655,56.298
NetC5_2: C5.2 DA2.4 | length 4.6
  Top Layer w0.2: C5.2 DA2.4@37.155,56.298
NetC6_2: C6.2 DA3.4 | length 4.6
  Top Layer w0.2: C6.2 DA3.4@55.18,56.298
NetC10_2: C10.2 C11.2 C12.2 DA4.2 R2.2 R3.1 | length 12.5
  Top Layer w0.2: DA4.2 C10.2 6.9,45.292 cw(c7.156,45.292) C11.2 6.975,48.232 cw(c7.316,48.232) C12.2 7.075,50.333 ccw(c6.17,50.333) R3.1 6.81,52.798 7,52.798
NetC13_1: C13.1 C14.1 C15.1 DA4.4 R3.2 | length 10.5
  Top Layer w0.2: R3.2 ccw(c6.65,50.213) 5.575,50.213 C15.1 cw(c5.273,48.171) 5.7,48.171 C14.1 5.7,43.396 ccw(c6.297,43.396) C13.1 5.875,40.684 ccw(c5.96,40.684) DA4.4
NetC16_2: C16.2 C17.2 C18.2 DA5.2 R4.2 R5.1 | length 13.2
  Top Layer w0.2: DA5.2 71.009,24.523 C16.2 71.145,27.623 C17.2 71.145,32.873 C18.2 71.25,35.421 70.975,35.696 R5.1 70.988,35.736 70.988,37.336 71,37.348
NetC19_1: C19.1 C20.1 C21.1 DA5.4 R5.2 | length 11.6
  Top Layer w0.2: DA5.4 69.991,24.523 C19.1 69.991,29.973 C20.1 69.855,32.873 C21.1 69.75,35.391 70.055,35.696 R5.2
NetC22_2: C22.2 DA6.8 R7.2 R8.2 | length 4.9
  Top Layer w0.2: DA6.8 C22.2 R8.2 92.187,33.936 93.367,33.936 R7.2
NetC23_2: C23.2 DA6.1 R9.1 | length 7.7
  Top Layer w0.2: DA6.1 88.475,38.848 90.895,41.268 C23.2 90.883,41.306 90.883,42.421 R9.1
NetC24_1: C24.1 DA6.3 | length 4.6
  Top Layer w0.2: C24.1 86.965,40.206 87.475,39.696 DA6.3
NetC24_2: C24.2 DA6.2 R10.1 | length 5.5
  Top Layer w0.2: R10.1 87.923,41.293 87.923,40.243 87.975,40.191 DA6.2
NetDA4_7: DA4.7 W4.2
NetDA4_15: DA4.15 W5.1
NetDA5_7: DA5.7 W6.2
NetDA5_15: DA5.15 W7.1
NetDA6_6: DA6.6 W8.2
NetDD1_4: DD1.4 S1.1 | length 10
  Top Layer w0.2: v2(88.775,62.275) S1.1@89,62.275
  Bottom Layer w0.2: v2(85.365,53.873) 85.365,58.865 v2(88.775,62.275)
NetR1_2: R1.2 W2.3 | length 2.9
  Top Layer w1.1: W2.3 R1.2
NetW2_2: W2.2 W3.1
NetW3_2: W3.2 XW2.1 | length 21.3
  Top Layer w1.05: XW2.1 86.724,-8.625 86.724,11.725
RX: DD1.2 XS2.1 | length 14.7
  Top Layer w0.4: XS2.1 86.85,66.975 87.269,66.556 87.269,54.985 87.84,54.414 87.84,53.939 DD1.2
TX: DD1.3 XS2.2 | length 16.2
  Top Layer w0.4: XS2.2 82.06,66.975 81.826,66.741 81.826,62.995 86.635,58.186 DD1.3
VCC: C28.2 DD1.1 R12.1 S1.2 S1.3 S1.4 | length 27.4
  Top Layer w0.2: S1.4 S1.3 S1.2 ; C28.2 93.305,53.868 94.32,53.868 R12.1
  Top Layer w0.4: DD1.1 C28.2 93.3,53.926 93.313,53.938 93.313,62.362 S1.2
pads on no net: MH1.1 MH1.MH1 MH2.1 MH2.MH2 MH3.1 MH3.MH3 MH4.1 MH4.MH4 MH5.1 MH5.MH5 MH6.1 MH6.MH6 MH7.1 MH7.MH7 MH8.1 MH8.MH8 MH9.1 MH9.MH9 MH10.1 MH10.MH10

## Polygon pours and split planes (outlines as drawn)
GND on Top Layer "GND_L01_P000" (solid, pour order 0): -10,32 ccw(c-11.207,33.207) -9.5,33.207 -9.5,33.5 ccw(c-11.914,33.5) -10.207,35.207 -11.146,36.146 cw(c-10.293,37) -11.5,37 -11.5,41 cw(c-7.879,41) -10.439,43.561 -9.854,44.146 ccw(c-10.707,45) -9.5,45 -9.5,46.293 ccw(c-10,46.293) -9.646,46.646 cw(c-8.793,47.5) -10,47.5 -10,62 2,74 102,74 114,62 114,2 102.5,-10 95,-10 cw(c95,-8.793) 94.146,-9.646 93.854,-9.354 ccw(c93,-10.207) 93,-9 ccw(c93,-12.621) 90.439,-10.061 89.354,-11.146 cw(c88.5,-10.293) 88.5,-11.5 85,-11.5 cw(c85,-10.293) 84.146,-11.146 83.061,-10.061 ccw(c80.5,-12.621) 80.5,-9 ccw(c80.5,-10.207) 79.646,-9.354 79.354,-9.646 cw(c78.5,-8.793) 78.5,-10 2,-10 -10,2
GND on Bottom Layer "GND_L02_P001" (solid, pour order 1): -10,32 ccw(c-11.207,33.207) -9.5,33.207 -9.5,33.5 ccw(c-11.914,33.5) -10.207,35.207 -11.146,36.146 cw(c-10.293,37) -11.5,37 -11.5,41 cw(c-7.879,41) -10.439,43.561 -9.854,44.146 ccw(c-10.707,45) -9.5,45 -9.5,46.293 ccw(c-10,46.293) -9.646,46.646 cw(c-8.793,47.5) -10,47.5 -10,62 2,74 102,74 114,62 114,2 102.5,-10 95,-10 cw(c95,-8.793) 94.146,-9.646 93.854,-9.354 ccw(c93,-10.207) 93,-9 ccw(c93,-12.621) 90.439,-10.061 89.354,-11.146 cw(c88.5,-10.293) 88.5,-11.5 85,-11.5 cw(c85,-10.293) 84.146,-11.146 83.061,-10.061 ccw(c80.5,-12.621) 80.5,-9 ccw(c80.5,-10.207) 79.646,-9.354 79.354,-9.646 cw(c78.5,-8.793) 78.5,-10 2,-10 -10,2

## Other copper
Top Layer:
  pour cut-out: 72.85,22.74 ccw(c75.39,22.74) 75.39,20.2 82.025,20.2 cw(c82.025,20.175) 82.05,20.175 cw(c82.05,19.873) 82.263,20.087 83.575,18.775 cw(c83.454,18.654) 83.625,18.654 83.625,-11.44 cw(c83.54,-11.44) 83.6,-11.5 89.8,-11.5 89.8,-5.185 cw(c89.885,-5.185) 89.825,-5.125 ccw(c89.644,-4.944) 89.9,-4.944 89.9,19.148 ccw(c87.36,19.148) 89.156,20.944 84.349,25.751 ccw(c84.05,25.453) 84.05,25.875 ccw(c82.541,24.366) 82.541,26.5 75.39,26.5 ccw(c75.39,23.96) 72.85,23.96
  pour cut-out: 86.865,33.173 ccw(c86.865,30.633) 84.325,30.633 84.325,28.771 cw(c82.054,28.771) 82.054,26.5 ccw(c82.054,25.271) 80.825,25.271 80.825,21.607 ccw(c81.382,21.607) 81.382,21.05 85.085,21.05 cw(c85.085,18.51) 87.625,18.51 87.625,16.375 ccw(c87.9,16.375) 87.9,16.1 89.869,16.1 89.869,18.667 cw(c92.15,18.667) 92.15,20.948 ccw(c92.15,23.188) 94.39,23.188 94.39,24.985 ccw(c92.125,24.985) 92.125,27.25 90.802,28.573 cw(c91.229,29) 90.625,29 90.625,30.633 ccw(c88.085,30.633) 88.085,33.173
  pour cut-out: 68.125,20.225 cw(c64.895,20.48) 64.635,17.25 61.454,17.25 16.625,33.425 11.34,33.425 cw(c11.34,35.965) 8.8,35.965 8.8,43.035 cw(c11.34,43.035) 11.34,45.575 17.725,45.575 62.875,29.45 64.635,29.45 cw(c65.068,26.393) 68.125,26.825
  pour cut-out: 4.106,39.993 ccw(c1.566,39.993) 1.566,42.533 -11.5,42.533 -11.5,36.233 1.566,36.233 ccw(c1.566,38.773) 4.106,38.773

## Silkscreen, mask and mechanical layers (free items; w line width, h text height)
Top Overlay:
  drawing of 6 lines, arcs and shapes, not listed
  text "RX   TX" at 86.65,69.925 h1.5 r180
Top Solder:
  drawing of 5 lines, arcs and shapes, not listed